# Altium PCB STM8S003F3P6_RF_1RELAY_LEARN_CODE.PcbDoc
Units mm, origin at the board's own origin, x right, y up, seen from the top; angles counter-clockwise.
Board outline 44.2 x 20.22 mm, 2 copper layers (Top Layer, Bottom Layer); 15 components, 14 nets, 63 pads, 6 vias.
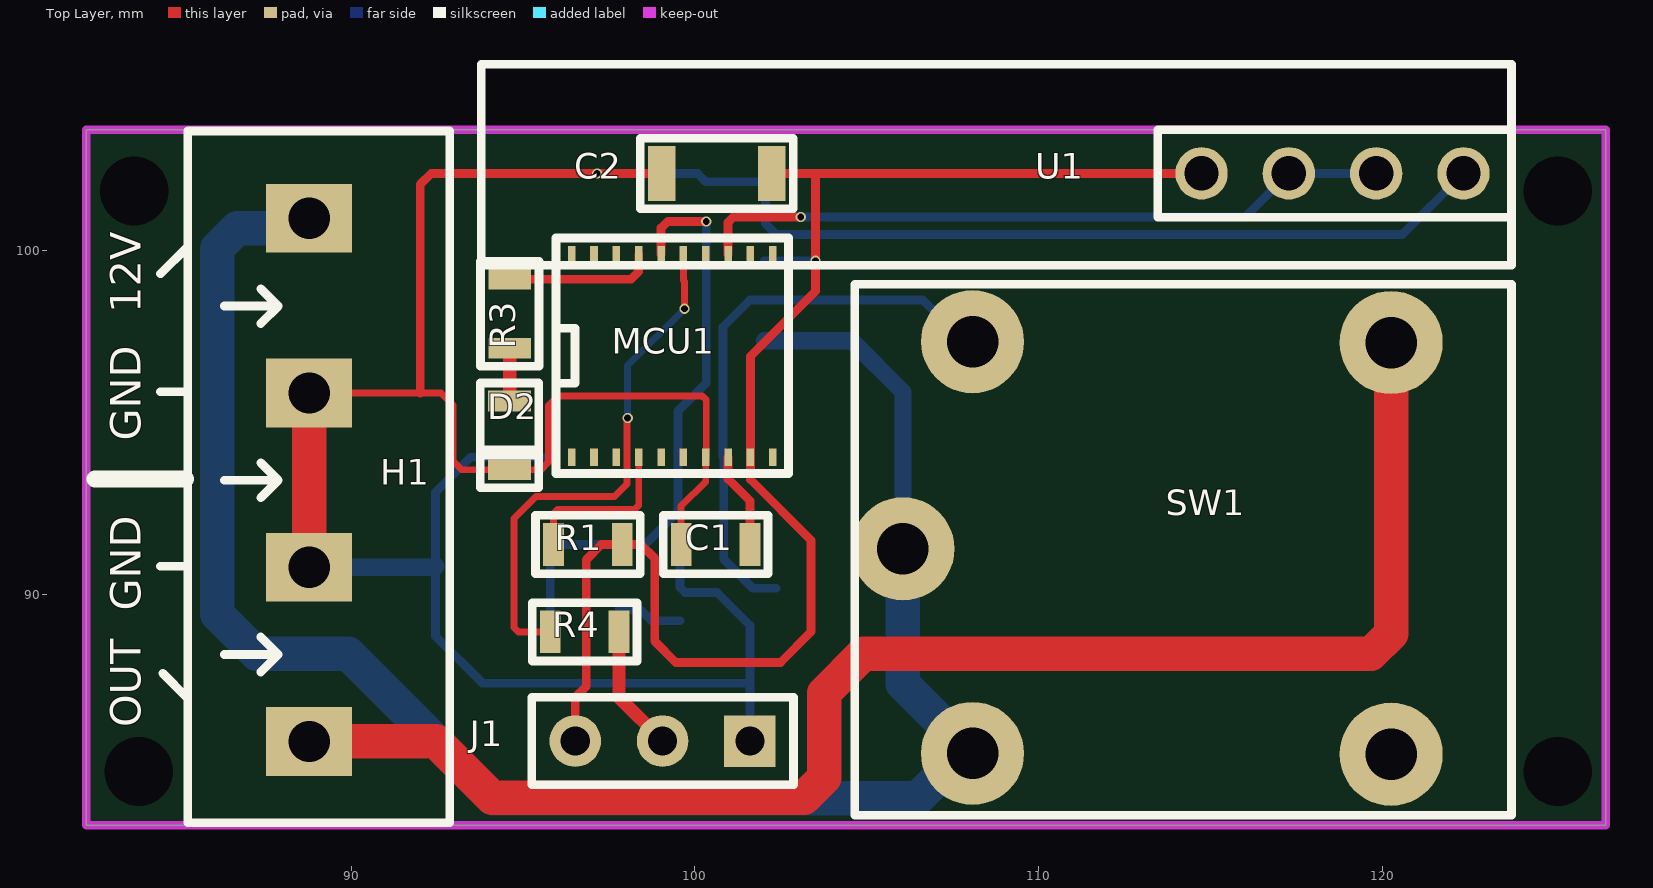
[diagram p0: Top Layer view]
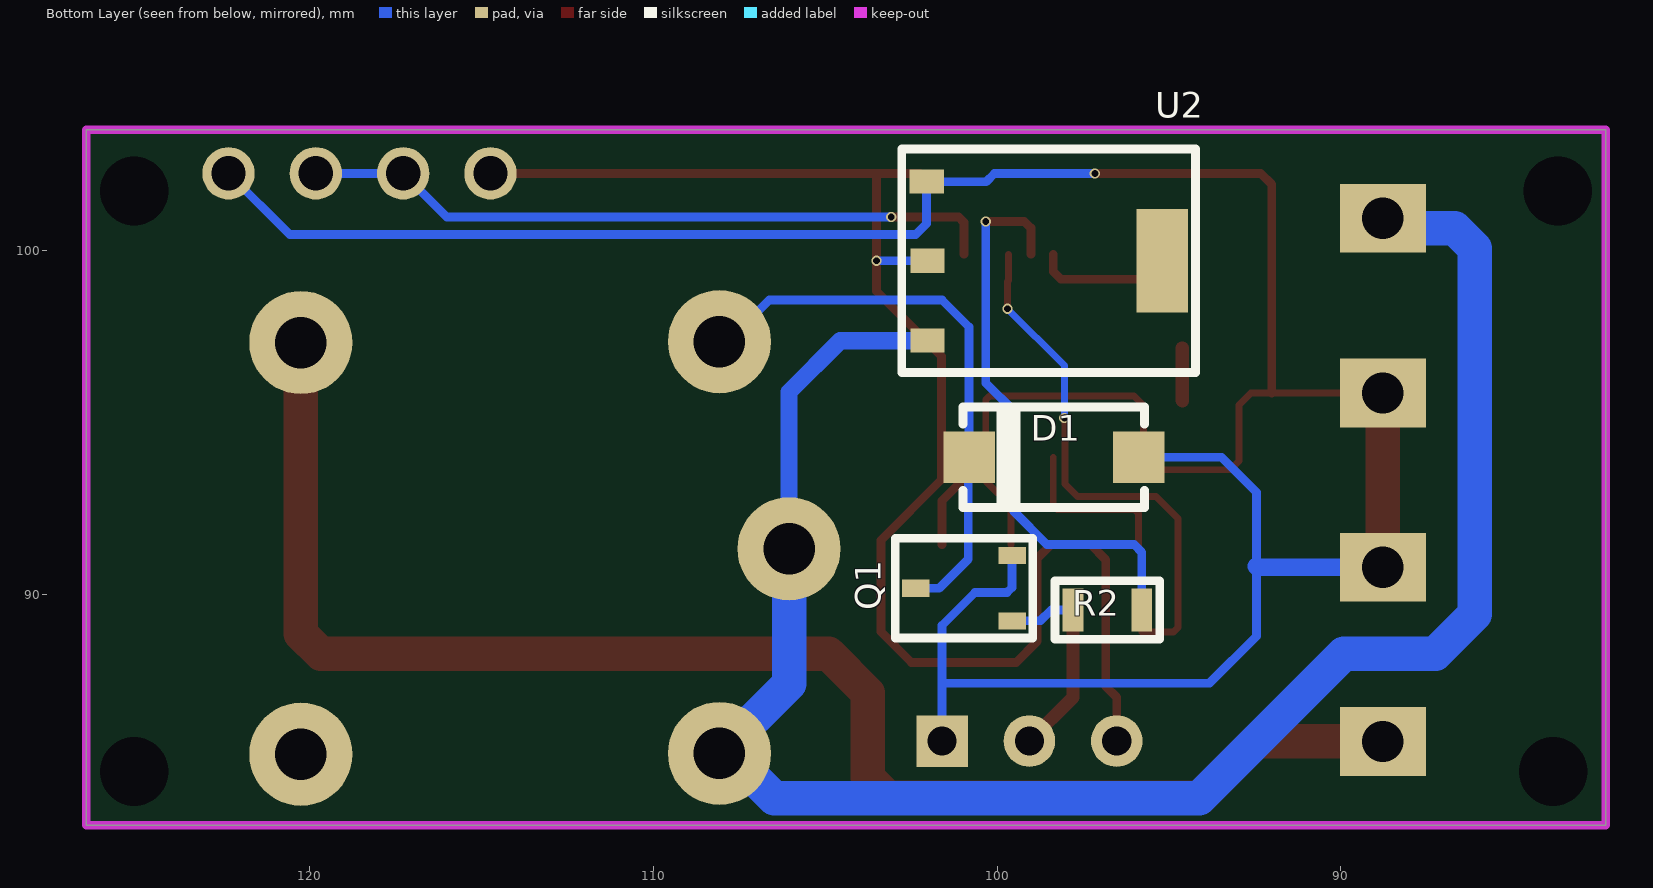
[diagram p1: Bottom Layer view, seen from below]

## Layer stack, top to bottom
Top Solder: solder mask 0.0102, Solder Resist, Dk 3.5
Top Layer: signal copper 0.0356
Dielectric 1: dielectric 0.32, FR-4, Dk 4.8
Bottom Layer: signal copper 0.0356
Bottom Solder: solder mask 0.0102, Solder Resist, Dk 3.5

## Board outline
82.296,83.28 82.296,103.505 126.492,103.505 126.492,83.28

## Design rules (kind name [scope] priority, off if disabled: settings)
Clearance [All] p1: gap=0.1 ignorepadtopadclearanceinfootprint=FALSE
PolygonConnect [All] p1: connectstyle=Relief reliefconductorwidth=0.254 reliefentries=4 polygonreliefangle="90 Angle" airgapwidth=0.254
RoutingVias [All] p1: holewidth=0.2 width=0.3 viastyle="Through Hole" minholewidth=0.2 minwidth=0.3 maxholewidth=0.2 maxwidth=0.3
SolderMaskExpansion [All] p1: expansion=0.102 istentingtop=FALSE
Width [All] p1: maxlimit=1.27 minlimit=0.2 preferedwidth=0.254
30 further rules are at their usual default settings.

## Components (designator, comment, footprint, x,y, rotation, side; value= is the part's Value field where it differs from the comment)
C1 "104" C0805 100.6,91.44 r0 top
C2 "105" C1206 100.635,102.235 r0 top
D1 "1N4007" DO-214AC(SMA) 100.315,93.98 r180 bottom
D2 "LED0805" L0805RED 93.98,94.615 r270 top
H1 "Header 4" "HEADER 4" 88.9,93.345 r270 top
J1 "Header 3x1 TH Pitch 2.54mm" "Header 3x1 TH Pitch 2.54mm" 99.06,85.725 r180 top
MCU1 "STM8S003F3P6" TSSOP20_0.65_4.4 99.34,96.93 r90 top
Q1 "2N3904" SOT23-3 100.965,90.17 r90 bottom
R1 "10k" R0805 97.885,91.44 r0 top
R2 "10k" R0805 95.79,89.535 r180 bottom
R3 "10k" R0805 94.615,99.155 r90 top
R4 "10k" R0805 97.79,88.9 r0 top
SW1 "RELAY_10A" RELAY_10A_5PIN 114.3,91.44 r0 top
U1 "RF433_315_RECEVICE" RF433_315_RECEVICE 109.655,102.235 r0 top
U2 "AMS1117" SOT223-3 98.575,99.695 r270 bottom

## Footprints (in the part's own frame and the unit in brackets; to place one, negate y for a bottom-side part, rotate by r counter-clockwise, add the part's x,y. Pads: shape width x height; smd on the part's side, far side on the other; paste and mask are expansions set on the pad)
C0805 [mm]
  rect 0.6x1.24 smd: 1(-1,0) 2(1,0)
  silkscreen extent -1.52,-0.85 1.53,0.85, body extent -1,-0.6 1,0.6, height 1
C1206 [mm]
  rect 0.8x1.6 smd: 1(-1.6,0) 2(1.6,0)
  silkscreen extent -2.23,-1.02 2.22,1.02, body extent -1.6,-0.8 1.6,0.8, height 0.75
DO-214AC(SMA) [mm]
  rect 1.5x1.5 smd: 1(4.43,0) 2(-0.5,0)
  silkscreen extent -0.67,-1.5 4.61,1.5, body extent -0.68,-1.46 4.6,1.46, height 2.41
"Header 3x1 TH Pitch 2.54mm" [mm]
  rect 1.5x1.5 hole 0.85: 1(-2.54,0)
  round 1.5 hole 0.85: 2(0,0) 3(2.54,0)
  silkscreen extent -3.81,-1.27 3.81,1.27, body extent -3.81,-1.27 3.81,1.27, height 8.89
"HEADER 4" [mm]
  rect 2x2.5 hole 1.2: 1(-7.583,-0.12) 2(-2.503,-0.12) 3(2.564,-0.12) 4(7.632,-0.12)
  silkscreen extent -10.12,-3.65 9.99,3.97, body extent -10.01,-3.58 9.99,3.92, height 10
L0805RED [mm]
  rect 0.6x1.24 smd: 1(-1,0.625) 2(1,0.625)
  silkscreen extent -1.53,-0.23 1.52,1.47, body extent -1,0 1,1.25, height 1.1
R0805 [mm]
  rect 0.6x1.24 smd: 1(-2,0) 2(0,0)
  silkscreen extent -2.52,-0.85 0.53,0.85, body extent -2,-0.62 0,0.62, height 0.45
RELAY_10A_5PIN [mm]
  round 3 hole 1.5: 1(-6.225,5.9) 2(-8.25,-0.125) 3(-6.225,-6.075) 4(5.95,-6.1) 5(5.95,5.875)
  silkscreen extent -9.65,-7.88 9.45,7.57, body extent -9.65,-7.88 9.45,7.62, height 15.3
RF433_315_RECEVICE [mil]
  round 60 hole 39.37: 1(200,0) 2(300,0) 3(400,0) 4(500,0)
  silkscreen extent -625,-105 555,125, body extent -626,-105 555,167, height 472
SOT23-3 [mm]
  rect 0.5x0.8 smd: 1(-0.95,-1.4) 2(0.95,-1.4) 3(0,1.4)
  silkscreen extent -1.45,-2 1.45,2, body extent -1.45,-1.4 1.45,1.4, height 1.3
SOT223-3 [mm]
  rect 0.7x1 smd: 1(-2.3,-3.475) 2(0,-3.45) 3(2.325,-3.45)
  rect 3x1.5 smd: 4(0,3.375)
  silkscreen extent -3.25,-4.2 3.25,4.35, body extent -3.25,-3.5 3.25,3.5, height 1.7
TSSOP20_0.65_4.4 [mm]
  rect 0.5x0.22 smd: 1(-2.95,2.925) 2(-2.95,2.275) 3(-2.95,1.625) 4(-2.95,0.975) 5(-2.95,0.325) 6(-2.95,-0.325) 7(-2.95,-0.975) 8(-2.95,-1.625) 9(-2.95,-2.275) 10(-2.95,-2.925) 11(2.95,-2.925) 12(2.95,-2.275) 13(2.95,-1.625) 14(2.95,-0.975) 15(2.95,-0.325) 16(2.95,0.325) 17(2.95,0.975) 18(2.95,1.625) 19(2.95,2.275) 20(2.95,2.925)
  silkscreen extent -3.42,-3.38 3.42,3.38, body extent -3.14,-3.25 3.14,3.25, height 1.09

## Part data
C1: library part C0805
C2: library part C1206
D1: library part "Diode 1N4007-DO214AC(SMA)"
Q1: library part "2N3904 (SOT-23)"
R1 R2 R3 R4: library part "Resistor SMD"
U1: library part RF433_315
U2: library part AMS1117(SOT-223)

## Free pads (board coordinates)
  round 1 hole 2: 2(83.693,101.727) 2(83.82,84.836) 2(125.095,84.836) 2(125.095,101.727)

## Via types
v1: diameter 0.3, hole 0.2, Top Layer to Bottom Layer, 6 vias

## Nets (pads, with @x,y where several pads share a name; then routed paths per layer and width w, separated by ;. In a path a pad name is that pad's centre, name@x,y a point inside that pad or via, vN(x,y) a via of type N, cw(c..) or ccw(c..) an arc to the next point about the centre after c; other vN are vias at no path point)
+12: H1.1 SW1.2 SW1.3 U2.3 | length 54.4
  Bottom Layer w0.5: U2.3 104.56,97.37 106.05,95.88 SW1.2
  Bottom Layer w1: H1.1 88.497,100.645 86.692,100.645 86.106,100.059 86.106,89.408 87.249,88.265 89.916,88.265 94.118,84.063 106.479,84.063 107.78,85.365 SW1.3 106.05,87.39 SW1.2
GND: C1.1 C2.1 D1.1 D2.2 H1.2 H1.3 J1.1 MCU1.7 Q1.2 U1.4 U2.1 | length 93.7
  Top Layer w0.2: H1.2 92.011,95.848 92.62,95.848 92.964,95.504 92.964,93.869 93.218,93.615 D2.2 95.52,93.615 95.743,93.838 95.743,95.489 96.012,95.758 100.213,95.758 100.33,95.641 100.33,93.995 MCU1.7 100.315,93.276 99.6,92.561 C1.1
  Top Layer w0.254: 92.011,95.848 92.011,101.917 92.329,102.235 v1(97.155,102.235) C2.1
  Top Layer w1: H1.3 H1.2
  Bottom Layer w0.254: D1.1 93.472,93.98 92.456,92.964 92.456,90.805 92.456,88.773 93.824,87.405 101.6,87.405 ; v1(97.155,102.235) 100.076,102.235 100.316,101.995 U2.1 102.05,100.769 102.362,100.457 120.577,100.457 U1.4 ; Q1.2 99.565,90.192 99.714,90.043 100.642,90.043 101.6,89.085 101.6,87.405 ; J1.1 101.6,87.405
  Bottom Layer w0.508: H1.3 92.432,90.781 92.456,90.805
NetC1_2: C1.2 MCU1.8 | length 2.8
  Top Layer w0.254: MCU1.8 100.965,93.345 101.6,92.71 C1.2
NetD1_2: D1.2 Q1.3 SW1.1 | length 16.7
  Bottom Layer w0.254: Q1.3 101.683,90.17 100.838,91.015 100.838,93.957 D1.2 100.815,97.767 101.6,98.552 106.627,98.552 107.839,97.34 SW1.1
NetD2_1: D2.1 R3.1 | length 1.5
  Top Layer w0.381: D2.1 94.615,95.625 R3.1
NetH1_4: H1.4 SW1.5 | length 44
  Top Layer w1: H1.4 92.468,85.713 94.107,84.074 103.173,84.074 103.759,84.66 103.759,87.122 104.902,88.265 119.664,88.265 120.25,88.851 SW1.5
NetJ1_2: J1.2 R4.2 | length 3.7
  Top Layer w0.381: R4.2 97.79,86.995 J1.2
NetMCU1_4: MCU1.4 R1.1 | length 4.9
  Top Layer w0.2: R1.1 95.885,92.339 96.002,92.456 98.248,92.456 98.365,92.573 MCU1.4
NetMCU1_13: MCU1.13 U1.2 U1.3 | length 20.4
  Top Layer w0.254: MCU1.13 100.965,100.816 101.114,100.965 v1(103.078,100.965)
  Bottom Layer w0.254: v1(103.078,100.965) 116.005,100.965 U1.2 U1.3
NetMCU1_15: MCU1.15 R4.1 | length 15.4
  Top Layer w0.2: R4.1 94.869,88.9 94.742,89.027 94.742,92.202 95.377,92.837 97.663,92.837 98.025,93.199 98.025,95.104 v1(98.044,95.123) ; MCU1.15 99.665,99.117 99.695,99.087 v1(99.695,98.298)
  Bottom Layer w0.2: v1(98.044,95.123) 98.044,96.647 v1(99.695,98.298)
NetMCU1_16: MCU1.16 R2.2 | length 16.8
  Top Layer w0.254: MCU1.16 99.015,100.644 99.209,100.838 v1(100.33,100.838) v1@100.323,100.831
  Bottom Layer w0.254: R2.2 95.79,91.218 96.012,91.44 98.552,91.44 99.504,92.392 99.504,95.313 100.33,96.139 v1(100.33,100.838)
NetMCU1_17: MCU1.17 R3.2 | length 4.3
  Top Layer w0.254: R3.2 98.139,99.155 98.365,99.381 MCU1.17
NetQ1_1: Q1.1 R2.1 | length 1.9
  Bottom Layer w0.254: R2.1 98.425,89.535 98.74,89.22 Q1.1
VCC: C2.2 J1.3 MCU1.9 R1.2 U1.1 U2.2 | length 44.2
  Top Layer w0.254: J1.3 96.52,86.995 96.837,87.312 96.837,90.995 97.282,91.44 R1.2 98.425,91.44 98.828,91.037 98.828,88.624 99.441,88.011 102.489,88.011 103.378,88.9 103.378,91.567 101.615,93.33 MCU1.9 101.615,96.916 103.505,98.806 v1(103.505,99.695) 103.505,102.235 ; C2.2 103.505,102.235 ; U1.1 103.505,102.235
  Bottom Layer w0.254: U2.2 v1(103.505,99.695)
pads on no net: MCU1.1 MCU1.2 MCU1.3 MCU1.5 MCU1.6 MCU1.10 MCU1.11 MCU1.12 MCU1.14 MCU1.18 MCU1.19 MCU1.20 SW1.4 U2.4

## Keep-outs
Keep-Out Layer:
  the board outline again, w0.25

## Silkscreen, mask and mechanical layers (free items; w line width, h text height)
Top Overlay:
  lines w0.25: 84.455,90.805 85.217,90.805 ; 84.455,95.885 85.217,95.885 ; 84.455,99.314 85.217,100.076 ; 84.519,87.694 85.217,86.995
  lines w0.5: 82.55,93.345 85.185,93.345
  text "12V" at 84.176,98.173 h1.5 r90
  text "GND" at 84.173,94.461 h1.5 r90
  text "GND" at 84.173,89.508 h1.5 r90
  text "OUT" at 84.173,86.131 h1.5 r90